# EAGLE board atmel_midi_clock (EAGLE 7.2.0)
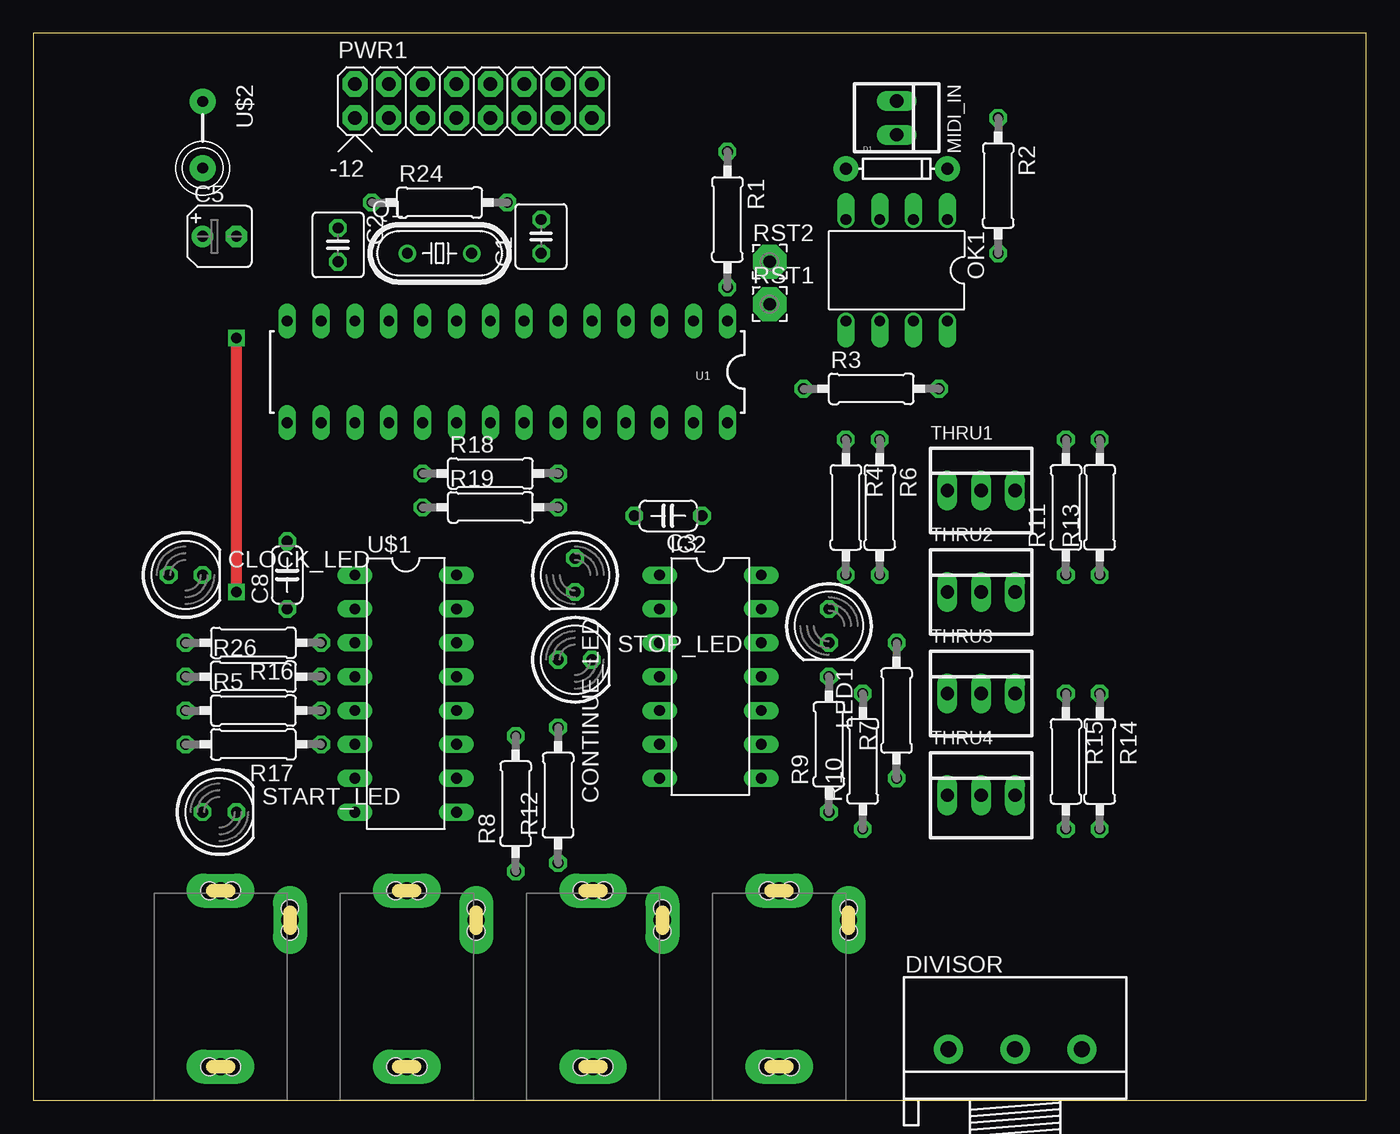
[diagram p0: board, top side]
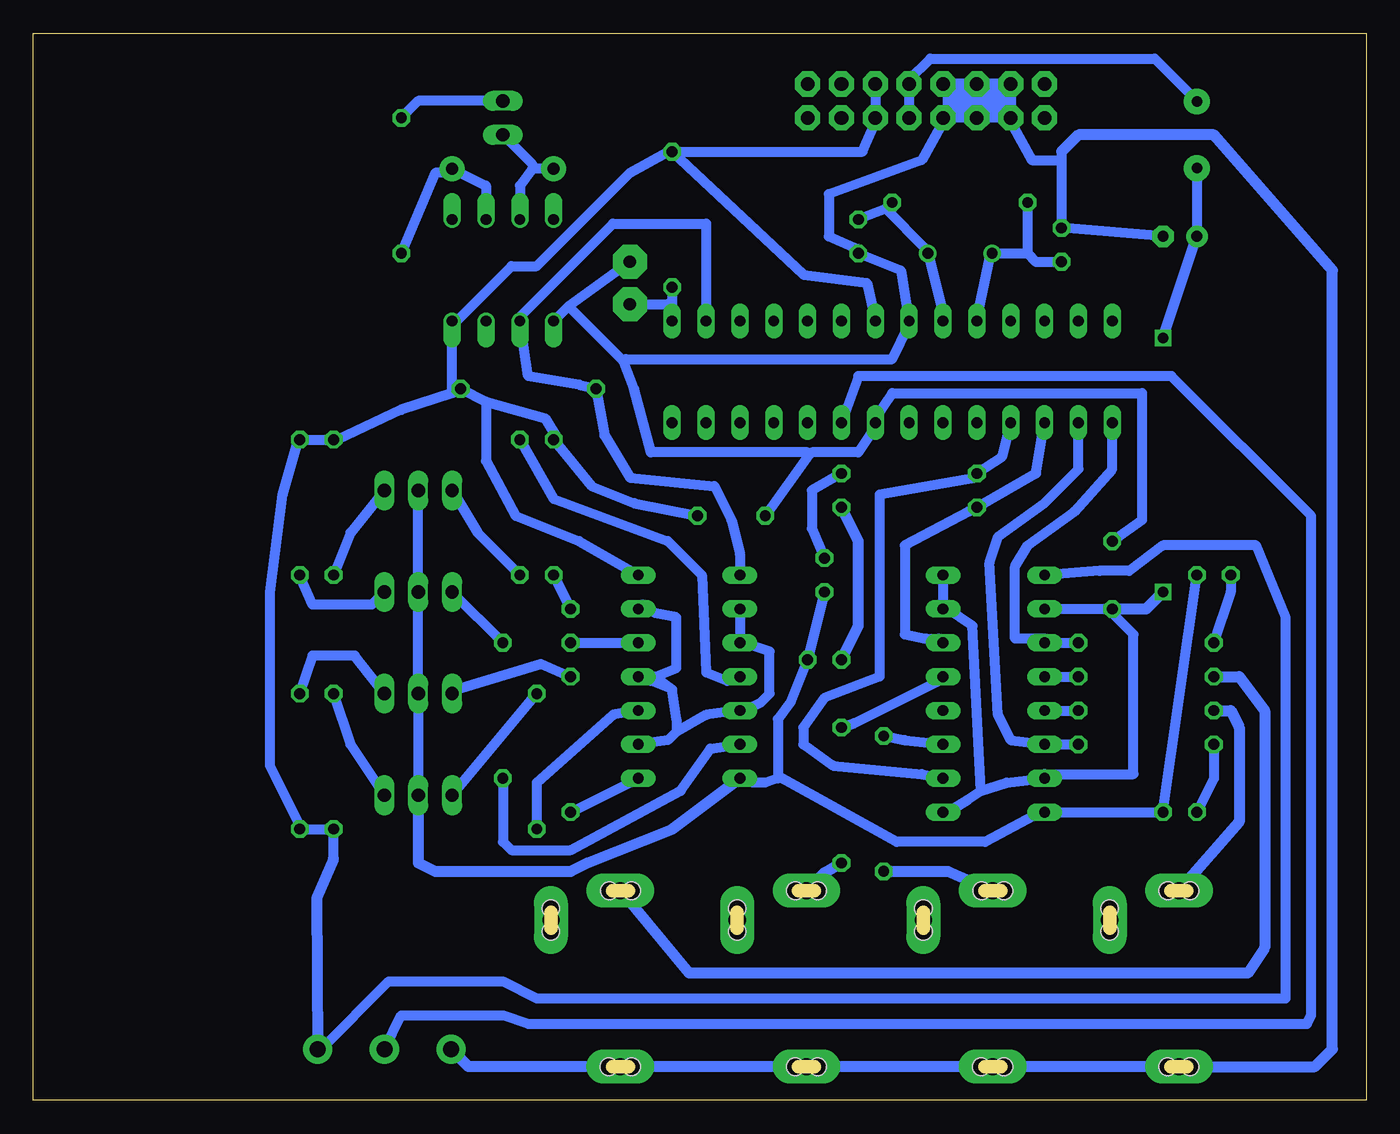
[diagram p1: board, bottom side, seen from below]

Size 100 x 80 mm. Coordinates in mm from the lower left corner, seen from the top.
Outline: 0,0 100,0 100,80 0,80 0,0
Copper layers (1*16): Top 0.035mm / dielectric 1.5mm / Bottom 0.035mm
Design rules "default *": minimum track width 30mil, minimum drill 31mil, track to track 14mil, track to pad 14mil, pad to pad 14mil, via to via 14mil, smd to smd 8mil, copper to edge 0mil, drill to drill 14mil, minimum pad ring 10mil, minimum via ring 8mil, stop-mask expansion 4mil, vias tented up to drill 0mil, thermal gap 10mil
Net classes: 1 GND: width 1.016 mm, drill 1.016 mm, clearance 0.508 mm

## Footprints (pad centres in the part's own frame; a part is rotated, then mirrored left to right if it is on the bottom)
C025-040X050 = drill 0.813 octagon: 1 -1.27,0; 2 1.27,0
C050-024X044 = drill 0.813 octagon: 1 -2.54,0; 2 2.54,0
B45181A = drill 0.813 pad 1.6: + -1.27,0 | drill 0.813 pad 1.6 octagon: - 1.27,0
ERTHENVAR-JACK-90DEG = drill 1.3 pad 2.54 long: P$1 5,-2.5; P$2 -0.2,-13.5; P$3 5,-15.7 | hole 1.3: 5.842,-2.489; 4.14,-2.489; -0.203,-12.649; -0.203,-14.351; 5.842,-15.697; 4.166,-15.697
LED5MM = drill 0.813 octagon: A -1.27,0; K 1.27,0
DIODE-1N4148 = drill 0.9 pad 1.88: A -3.81,0; C 3.81,0
3RP/1610N = drill 1.2 pad 2.184: 1 -5,0; 2 0,0; 3 5,0
DIL14 = drill 0.813 long: 1 -7.62,-3.81; 2 -5.08,-3.81; 3 -2.54,-3.81; 4 0,-3.81; 5 2.54,-3.81; 6 5.08,-3.81; 7 7.62,-3.81; 8 7.62,3.81; 9 5.08,3.81; 10 2.54,3.81; 11 0,3.81; 12 -2.54,3.81; 13 -5.08,3.81; 14 -7.62,3.81
22-23-2021 = drill 1 long: 1 -1.27,0; 2 1.27,0
DIL08 = drill 0.813 offset: 1 -3.81,-3.81; 2 -1.27,-3.81; 3 1.27,-3.81; 4 3.81,-3.81; 5 3.81,3.81; 6 1.27,3.81; 7 -1.27,3.81; 8 -3.81,3.81
POWER_16 = drill 1.016 pad 1.88 octagon: 1 -6.35,-1.27; 2 -6.35,1.27; 3 -3.81,-1.27; 4 -3.81,1.27; 5 -1.27,-1.27; 6 -1.27,1.27; 7 1.27,-1.27; 8 1.27,1.27; 9 3.81,-1.27; 10 3.81,1.27; 11 6.35,-1.27; 12 6.35,1.27; 13 8.89,-1.27; 14 8.89,1.27; 15 11.43,-1.27; 16 11.43,1.27
HC49/S = drill 0.813: 1 -2.413,0; 2 2.413,0
0207/10 = drill 0.813 octagon: 1 -5.08,0; 2 5.08,0
2,54/0,9 = drill 0.914 pad 2.54 octagon: 1 0,0
22-23-2031 = drill 1 long: 1 -2.54,0; 2 0,0; 3 2.54,0
DIL28-3 = drill 0.813 long: 1 -16.51,-3.81; 2 -13.97,-3.81; 3 -11.43,-3.81; 4 -8.89,-3.81; 5 -6.35,-3.81; 6 -3.81,-3.81; 7 -1.27,-3.81; 8 1.27,-3.81; 9 3.81,-3.81; 10 6.35,-3.81; 11 8.89,-3.81; 12 11.43,-3.81; 13 13.97,-3.81; 14 16.51,-3.81; 15 16.51,3.81; 16 13.97,3.81; 17 11.43,3.81; 18 8.89,3.81; 19 6.35,3.81; 20 3.81,3.81; 21 1.27,3.81; 22 -1.27,3.81; 23 -3.81,3.81; 24 -6.35,3.81; 25 -8.89,3.81; 26 -11.43,3.81; 27 -13.97,3.81; 28 -16.51,3.81
DIL16 = drill 0.813 long: 1 -8.89,-3.81; 2 -6.35,-3.81; 3 -3.81,-3.81; 4 -1.27,-3.81; 5 1.27,-3.81; 6 3.81,-3.81; 7 6.35,-3.81; 8 8.89,-3.81; 9 8.89,3.81; 10 6.35,3.81; 11 3.81,3.81; 12 1.27,3.81; 13 -1.27,3.81; 14 -3.81,3.81; 15 -6.35,3.81; 16 -8.89,3.81
FB = drill 0.8 pad 1.93: P$1 -2.5,0; P$2 2.5,0

## Placement (x,y rotation side)
C1  27pF  [C025-040X050]  38.1,64.77 90 top
C2  27pF  [C025-040X050]  22.86,64.14 270 top
C3  .1uF  [C050-024X044]  47.62,43.81 180 top
C5  10u  [B45181A]  13.97,64.77 0 top
C8  100n  [C050-024X044]  19.05,39.37 90 top
CLOCK  AUDIO-JACK  [ERTHENVAR-JACK-90DEG]  60.96,0 180 top
CLOCK_LED  [LED5MM]  11.43,39.37 0 top
CONTINUE  AUDIO-JACK  [ERTHENVAR-JACK-90DEG]  33.02,0 180 top
CONTINUE_LED  [LED5MM]  40.64,39.37 270 top
D1  [DIODE-1N4148]  64.77,69.85 0 top
DIVISOR  100k  [3RP/1610N]  73.66,3.81 0 top
IC2  40106N  [DIL14]  50.8,31.75 270 top
LED1  [LED5MM]  59.69,35.56 270 top
MIDI_IN  22-23-2021  [22-23-2021]  64.77,73.66 270 top
OK1  6N138  [DIL08]  64.77,62.23 180 top
PWR1  POWER  [POWER_16]  30.48,74.93 0 top
Q1  [HC49/S]  30.48,63.5 0 top
R1  10k  [0207/10]  52.07,66.04 270 top
R2  220  [0207/10]  72.39,68.58 270 top
R3  270  [0207/10]  62.87,53.34 0 top
R4  330  [0207/10]  60.96,44.45 270 top
R5  1k  [0207/10]  16.51,29.21 0 top
R6  220  [0207/10]  63.5,44.45 270 top
R7  220  [0207/10]  64.77,29.21 90 top
R8  1k  [0207/10]  36.2,22.23 90 top
R9  220  [0207/10]  59.69,26.67 90 top
R10  220  [0207/10]  62.23,25.4 90 top
R11  220  [0207/10]  77.47,44.45 90 top
R12  1k  [0207/10]  39.37,22.86 90 top
R13  220  [0207/10]  80.01,44.45 90 top
R14  220  [0207/10]  80.01,25.4 270 top
R15  220  [0207/10]  77.47,25.4 270 top
R16  330  [0207/10]  16.51,34.29 180 top
R17  330  [0207/10]  16.51,26.67 180 top
R18  330  [0207/10]  34.29,46.99 0 top
R19  330  [0207/10]  34.29,44.45 0 top
R24  1M  [0207/10]  30.48,67.31 0 top
R26  1k  [0207/10]  16.51,31.75 0 top
RST1  reset  [2,54/0,9]  55.24,59.69 0 top
RST2  reset  [2,54/0,9]  55.24,62.87 0 top
START  AUDIO-JACK  [ERTHENVAR-JACK-90DEG]  19.05,0 180 top
START_LED  [LED5MM]  13.97,21.59 0 top
STOP  AUDIO-JACK  [ERTHENVAR-JACK-90DEG]  46.99,0 180 top
STOP_LED  [LED5MM]  40.64,33.02 0 top
THRU1  22-23-2031  [22-23-2031]  71.12,45.72 0 top
THRU2  22-23-2031  [22-23-2031]  71.12,38.1 0 top
THRU3  22-23-2031  [22-23-2031]  71.12,30.48 0 top
THRU4  22-23-2031  [22-23-2031]  71.12,22.86 0 top
U1  ATMEGA328P_PDIP  [DIL28-3]  35.56,54.61 180 top
U$1  40109  [DIL16]  27.94,30.48 270 top
U$2  FB  [FB]  12.7,72.39 270 top

## Library data of the parts
C1-C3 C5 C8 R1-R19 R24 R26 = rcl
CLOCK CONTINUE START STOP = erthenvar
CLOCK_LED CONTINUE_LED LED1 START_LED STOP_LED = led
D1 = SparkFun-DiscreteSemi
DIVISOR = pot
IC2 U$1 = 40xx
MIDI_IN = con-molex; MF: MOLEX; MPN: 22-23-2021; OC_FARNELL: 1462926; OC_NEWARK: 25C3832
OK1 = optocoupler; MF: VISHAY/TELEFUNKEN; MPN: 6N138; OC_FARNELL: 9860150; OC_NEWARK: 35K5294
PWR1 = eurorack
Q1 = crystal; OC_FARNELL: 1667008; OC_NEWARK: unknown
RST1 RST2 = wirepad
THRU1-THRU4 = con-molex; MF: MOLEX; MPN: 22-23-2031; OC_FARNELL: 1462950; OC_NEWARK: 30C0862
U1 = SparkFun-DigitalIC
U$2 = adafruit

## Nets
+5V: C3.1 DIVISOR.3 IC2.14 OK1.8 PWR1.11 PWR1.12 R1.1 R3.2 R4.1 R11.2 R13.2 R14.2 R15.2 U1.7 U$1.1
+12V: C5.+ C8.1 U$1.2 U$1.7 U$1.9 U$1.15 U$1.16 U$2.P$2
GND: CLOCK_LED.K CONTINUE_LED.K IC2.7 START_LED.K STOP_LED.K THRU1.2 THRU2.2 THRU3.2 THRU4.2 U$1.8
N$1: R18.1 U1.18 U$1.10
N$2: R5.1 START.P$3
N$3: D1.A MIDI_IN.2 OK1.3
N$4: C1.2 Q1.2 R24.2 U1.9
N$5: C2.2 Q1.1 R24.1 U1.10
N$6: R19.1 U1.17 U$1.14
N$7: D1.C OK1.2 R2.2
N$8: MIDI_IN.1 R2.1
N$9: R16.1 U1.15 U$1.3
N$10: R17.1 U1.16 U$1.6
N$11: PWR1.9 PWR1.10 U$2.P$1
N$12: R5.2 U$1.5
N$13: CONTINUE.P$3 R8.1
N$14: R26.2 U$1.4
N$15: R12.2 U$1.13
N$16: R8.2 U$1.11
N$17: IC2.2 IC2.3 IC2.5 IC2.9 IC2.11 IC2.13
N$18: R12.1 STOP.P$3
N$19: DIVISOR.2 U1.23
N$20: IC2.12 LED1.K
N$21: LED1.A R4.2
N$22: IC2.4 R6.1
N$23: IC2.6 R7.1
N$24: IC2.8 R9.1
N$25: IC2.10 R10.1
N$26: R6.2 THRU1.1
N$27: R7.2 THRU2.1
N$28: R9.2 THRU3.1
N$29: C1.1 C2.1 C3.2 C5.- C8.2 CLOCK.P$1 CONTINUE.P$1 DIVISOR.1 OK1.5 PWR1.3 PWR1.4 PWR1.5 PWR1.6 PWR1.7 PWR1.8 RST2.1 START.P$1 STOP.P$1 U1.8 U1.22
N$30: IC2.1 OK1.6 R3.1 U1.2
N$31: CLOCK.P$3 R26.1
N$32: R10.2 THRU4.1
N$33: R11.1 THRU1.3
N$34: R13.1 THRU2.3
N$35: R14.1 THRU3.3
N$36: R15.1 THRU4.3
N$37: R17.2 START_LED.A
N$38: CLOCK_LED.A R16.2
N$39: CONTINUE_LED.A R18.2
N$40: R19.2 STOP_LED.A
N$43: R1.2 RST1.1 U1.1

## Tracks (layer width: path | path; a pad name or v marks a point on that pad's centre or on a via)
+5V
  Bottom 0.762: PWR1.12 PWR1.11 36.83,73.34 37.78,71.12 R1.1 | U1.7 37.47,61.28 42.23,61.91 R1.1 | C3.1 54.93,44.77 58.1,46.04 R4.1 60.64,49.53 61.59,51.12 66.04,52.39 | IC2.14 59.05,41.91 63.82,43.81 66.04,47.94 66.04,52.39 | 66.04,52.39 R3.2 68.58,53.02 | 68.58,53.02 OK1.8 68.26,58.42 64.14,62.55 62.23,62.55 55.24,69.53 52.39,71.12 R1.1 | 68.58,53.02 72.39,51.75 77.15,49.53 R11.2 R13.2 80.01,49.85 81.28,45.4 82.23,38.1 82.23,25.08 80.01,20.64 R14.2 R15.2 77.47,18.1 | U$1.1 20,39.69 17.78,39.69 15.24,41.59 8.26,41.59 6.03,36.2 6.03,7.62 62.23,7.62 64.77,8.89 73.34,8.89 78.42,3.81 DIVISOR.3
  Bottom 0.813: 77.47,18.1 78.74,15.16 DIVISOR.3
+12V  (via drill 0.8)
  Top 0.813: v15.24,38.1 v15.24,57.15
  Bottom 0.762: U$1.2 C8.1 19.05,36.51 17.46,34.92 17.46,24.45 24.13,24.45 U$1.7 26.99,23.81 28.89,23.18 | U$1.16 U$1.15 31.43,36.83 29.53,35.56 28.89,23.18 | 28.89,23.18 29.84,22.54 31.43,21.59 U$1.9 | U$2.P$2 C5.+
  Bottom 0.813: C8.1 16.51,36.83 v15.24,38.1 | v15.24,57.15 C5.+
GND
  Bottom 0.762: THRU4.2 THRU3.2 THRU2.2 THRU1.2 | CONTINUE_LED.K STOP_LED.K 43.18,29.84 44.13,28.57 44.13,24.13 | IC2.7 46.04,23.81 45.09,23.81 44.13,24.13 | CLOCK_LED.K START_LED.K U$1.8 24.45,21.59 28.57,19.37 35.24,19.37 43.81,24.13 44.13,24.13
  Bottom 0.813: THRU4.2 71.12,17.78 69.85,17.14 59.69,17.14 58.42,17.78 52.07,20.32 IC2.7
N$1
  Bottom 0.762: U1.18 27.3,48.26 R18.1 29.21,46.67 36.51,45.4 36.51,31.75 40.64,30.16 42.23,27.94 42.23,26.67 40.01,25.08 33.34,24.45 U$1.10
N$2
  Bottom 0.813: R5.1 10.16,29.21 9.53,27.94 9.53,20.86 START.P$3
N$3
  Bottom 0.762: OK1.3 63.5,68.58 62.55,69.85 | D1.A 62.55,69.85 | MIDI_IN.2 62.55,70.17 62.55,69.85
N$4
  Bottom 0.762: R24.2 36.04,66.83 | 36.04,66.83 C1.2 | U1.9 31.75,59.05 Q1.2 33.02,63.82 36.04,66.83
N$5
  Bottom 0.762: C2.2 24.77,62.87 25.4,63.5 | 25.4,63.5 Q1.1 28.26,63.18 29.21,58.74 U1.10 | 25.4,63.5 R24.1
N$6
  Bottom 0.762: U1.17 24.77,46.99 R19.1 29.84,44.13 34.61,41.59 34.61,34.92 33.02,34.61 32.07,34.61 U$1.14
N$7
  Bottom 0.762: OK1.2 66.04,68.58 D1.C 68.58,69.53 69.85,69.53 R2.2
N$8
  Bottom 0.762: R2.1 71.12,74.93 MIDI_IN.1
N$9
  Bottom 0.762: R16.1 U$1.3 24.13,34.61 26.35,34.61 26.35,40.01 25.4,41.59 21.91,44.13 19.05,47.31 U1.15
N$10
  Bottom 0.762: R17.1 U$1.6 26.67,26.99 27.62,28.89 28.26,40.32 27.62,42.23 24.13,44.77 21.59,47.31 U1.16
N$11
  Bottom 0.762: PWR1.9 PWR1.10 34.29,76.52 32.7,78.11 15.88,78.11 12.7,74.93 U$2.P$1
N$12
  Bottom 0.762: U$1.5 R5.2
N$13
  Bottom 0.813: R8.1 31.37,17.14 CONTINUE.P$3
N$14
  Bottom 0.762: U$1.4 R26.2
N$15
  Bottom 0.762: U$1.13 32.07,31.43 38.42,28.26 R12.2
N$16
  Bottom 0.762: U$1.11 34.61,26.99 R8.2
N$17
  Bottom 0.762: IC2.2 IC2.3 46.67,34.29 44.77,33.66 44.77,30.48 45.4,29.84 46.67,29.21 IC2.5 47.31,29.21 49.53,28.89 51.75,27.62 | IC2.9 52.39,26.99 51.75,27.62 | IC2.11 53.66,31.43 52.07,30.8 | 52.07,30.8 51.75,28.57 51.75,27.62 | IC2.13 54.29,37.15 53.34,36.51 51.75,36.2 51.75,32.38 53.34,31.75 52.07,30.8
N$18
  Bottom 0.813: R12.1 40.64,17.05 STOP.P$3
N$19
  Bottom 0.762: U1.23 38.1,54.29 14.61,54.29 4.13,43.81 4.13,6.35 4.45,5.71 62.87,5.71 64.77,6.35 72.39,6.35 DIVISOR.2
N$20
  Bottom 0.762: LED1.K IC2.12
N$21
  Bottom 0.762: R4.2 LED1.A
N$22
  Bottom 0.762: IC2.4 47.94,31.43 49.53,32.07 49.85,39.37 52.39,41.91 60.96,45.09 R6.1
N$23
  Bottom 0.762: IC2.6 49.21,26.35 51.44,23.18 59.69,18.73 64.14,18.73 64.77,19.37 R7.1
N$24
  Bottom 0.762: R9.1 IC2.8
N$25
  Bottom 0.762: R10.1 62.23,23.81 56.52,28.89 54.93,29.21 IC2.10
N$26
  Bottom 0.762: R6.2 66.67,42.55 THRU1.1
N$27
  Bottom 0.762: THRU2.1 R7.2
N$28
  Bottom 0.762: R9.2 61.91,32.7 68.26,30.8 THRU3.1
N$29
  Bottom 0.762: C5.- C2.1 22.86,70.48 | PWR1.3 PWR1.4 PWR1.6 PWR1.8 | PWR1.3 PWR1.5 PWR1.7 31.75,73.34 33.34,70.48 40.32,67.94 40.32,64.77 38.1,63.82 C1.1 34.92,62.23 U1.8 34.29,58.1 35.56,55.56 55.56,55.56 55.72,55.4 | 22.86,71.12 22.86,70.48 | 22.86,70.48 25.08,70.48 26.67,73.34 PWR1.3 | RST2.1 59.85,59.53 | 59.85,59.53 OK1.5 | C8.2 16.83,43.5 16.83,53.02 35.56,53.02 36.83,51.12 U1.22 36.83,50.48 38.1,48.58 41.59,48.58 41.75,48.42 | 41.75,48.42 C3.2 | 55.72,55.4 54.93,53.34 53.66,48.58 41.91,48.58 41.75,48.42 | 55.72,55.4 59.85,59.53
  Bottom 0.813: 22.86,71.12 21.59,72.39 11.43,72.39 2.54,62.23 2.54,3.81 3.85,2.5 START.P$1 CONTINUE.P$1 STOP.P$1 CLOCK.P$1 67.35,2.5 DIVISOR.1
N$30
  Bottom 0.762: U1.2 49.53,65.72 56.52,65.72 63.5,58.74 OK1.6 62.87,54.29 59.05,53.66 R3.1 57.15,49.85 55.24,46.67 48.9,46.04 47.62,43.5 46.99,40.96 IC2.1
N$31
  Bottom 0.813: R26.1 9.53,31.75 7.62,29.21 7.62,11.43 8.89,9.53 50.8,9.53 55.88,15.62 CLOCK.P$3
N$32
  Bottom 0.762: THRU4.1 R10.2
N$33
  Bottom 0.762: R11.1 76.2,42.55 THRU1.3
N$34
  Bottom 0.762: R13.1 79.06,37.15 74.61,37.15 THRU2.3
N$35
  Bottom 0.762: R14.1 79.06,33.34 75.88,33.34 THRU3.3
N$36
  Bottom 0.762: R15.1 76.2,26.67 THRU4.3
N$37
  Bottom 0.762: START_LED.A 11.43,24.13 R17.2
N$38
  Bottom 0.762: R16.2 10.16,38.1 CLOCK_LED.A
N$39
  Bottom 0.762: CONTINUE_LED.A 41.59,42.86 41.59,45.72 R18.2
N$40
  Bottom 0.813: STOP_LED.A 38.1,35.56 38.1,41.91 R19.2
N$43
  Bottom 0.762: R1.2 U1.1 52.39,59.69 RST1.1
(copper drawn outside any net)
  shapes: Bottom area x1